# EAGLE board BatteryMonitor (EAGLE 7.1.0)
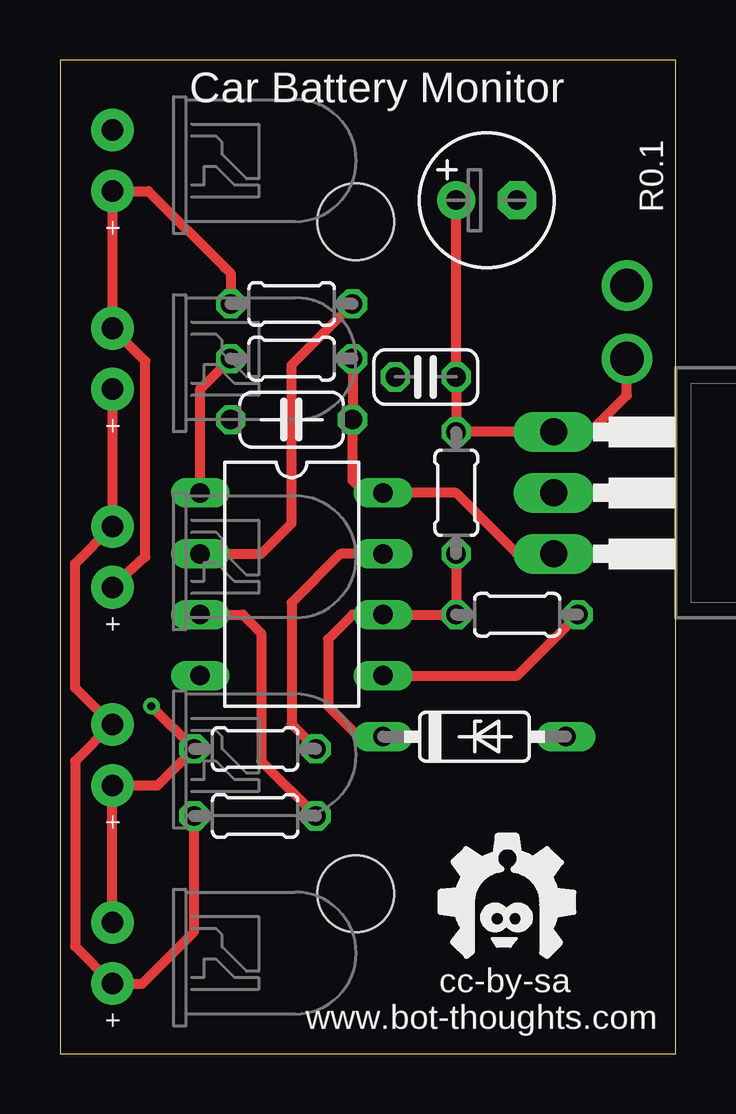
[diagram p0: board, top side]
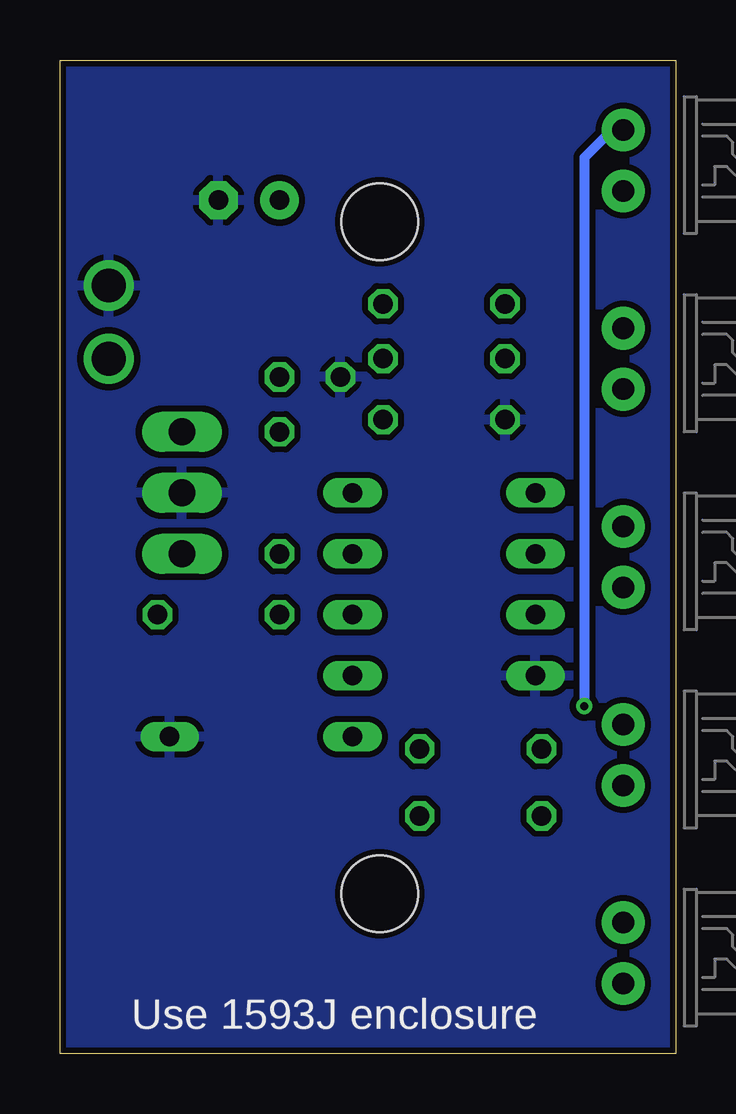
[diagram p1: board, bottom side, seen from below]

Size 25.65 x 41.4 mm. Coordinates in mm from the lower left corner, seen from the top.
Outline: 0,0 25.65,0 25.65,41.4 0,41.4 0,0
Copper layers (1*16): Top 0.0356mm / dielectric 1.5011mm / Bottom 0.0356mm
Design rules "LaenPCBOrder": minimum track width 6mil, minimum drill 13mil, track to track 10mil, track to pad 10mil, pad to pad 10mil, via to via 10mil, smd to smd 8mil, copper to edge 10mil, drill to drill 10mil, minimum pad ring 7mil, minimum via ring 7mil, stop-mask expansion 3mil, vias tented up to drill 20mil, thermal gap 10mil
Holes 3.2 mm at 12.32,6.67 12.32,34.66

## Footprints (pad centres in the part's own frame; a part is rotated, then mirrored left to right if it is on the bottom)
C050-024X044 = drill 0.813 octagon: 1 -2.54,0; 2 2.54,0
E2,5-6 = drill 0.813 pad 1.6: + -1.27,0 | drill 0.813 pad 1.6 octagon: - 1.27,0
C025-024X044 = drill 0.813 octagon: 1 -1.27,0; 2 1.27,0
DO35Z7 = drill 0.813 long: A 3.81,0; C -3.81,0
LED5MMRA = drill 0.9 pad 1.778: A 0,1.27; C 0,-1.27
0204/5 = drill 0.813 octagon: 1 -2.54,0; 2 2.54,0
DIL08 = drill 0.813 long: 1 -3.81,-3.81; 2 -1.27,-3.81; 3 1.27,-3.81; 4 3.81,-3.81; 5 3.81,3.81; 6 1.27,3.81; 7 -1.27,3.81; 8 -3.81,3.81
TO220BH-NH = drill 1.118 long: 1 -2.54,-6.35; 2 0,-6.35; 3 2.54,-6.35
PAD_18GA = drill 1.4: P$1 0,0

## Placement (x,y rotation side)
C1  104  [C050-024X044]  9.65,26.42 180 top
C2  106  [E2,5-6]  17.78,35.56 0 top
C3  104  [C025-024X044]  15.24,28.19 180 top
D2  5V  [DO35Z7]  17.27,13.21 0 top
LED1  yellow  [LED5MMRA]  2.18,12.45 180 top
LED2  red2  [LED5MMRA]  2.18,37.21 180 top
LED3  green  [LED5MMRA]  2.18,20.7 180 top
LED4  green  [LED5MMRA]  2.18,28.96 180 top
LED5  red1  [LED5MMRA]  2.18,4.19 180 top
R1  10K  [0204/5]  9.65,28.96 0 top
R2  5.1K  [0204/5]  19.05,18.29 180 top
R3  10K  [0204/5]  16.51,23.37 90 top
R4  330  [0204/5]  8.13,9.91 180 top
R5  330  [0204/5]  9.65,31.24 180 top
R6  330  [0204/5]  8.13,12.7 180 top
U1  TINY25  [DIL08]  9.65,19.56 270 top
U2  7805  [TO220BH-NH]  26.92,23.37 270 top
U$5  BTLOGO-LOGO-MD  [BTLOGOM]  18.54,3.81 0 top
X1  12V  [PAD_18GA]  23.62,28.96 180 top
X2  GND  [PAD_18GA]  23.62,32 180 top

## Library data of the parts
C1-C3 R1-R6 = bt_rcl
D2 = bt_diode
LED1-LED5 = bt_opto
U1 = bt_avr
U2 = bt_regulator
U$5 = bt
X1 X2 = bt_electromech

## Nets
12V: C2.+ C3.1 R3.2 U2.1 X1.P$1
GND: C1.2 C2.- C3.2 D2.A U1.4 U2.2 X2.P$1
N$1: R1.1 U1.1
N$2: LED2.A LED3.A LED4.C R5.2
N$3: LED1.C LED3.C LED4.A LED5.A R4.2
N$4: R4.1 U1.3
N$5: LED1.A LED2.C LED5.C R6.2
N$6: R5.1 U1.2
N$7: R6.1 U1.7
N$9: R2.1 U1.5
VCC: C1.1 R1.2 U1.8 U2.3
VTEST: D2.C R2.2 R3.1 U1.6

## Tracks (layer width: path | path; a pad name or v marks a point on that pad's centre or on a via)
12V
  Top 0.406: C2.+ C3.1 R3.2 U2.1 22.1,25.91 23.62,27.43 X1.P$1
GND
  pour Bottom: 0.03,41.4 25.65,41.4 25.9,0 0,0
N$1
  Top 0.406: U1.1 5.84,27.69 R1.1
N$2
  Top 0.406: LED4.C LED2.A 3.68,35.94 6.86,32.77 7.11,32.51 R5.2 | LED3.A 2.18,19.46 3.56,20.7 3.56,28.85 LED4.C | LED4.C 2.18,30.2
N$3
  Top 0.406: LED4.A LED3.C 0.64,20.42 0.64,15.24 2.16,13.72 | R4.2 5.59,5.08 3.43,2.92 LED5.A 0.64,4.47 0.64,12.19 2.16,13.72 | LED1.C 2.16,13.72
N$4
  Top 0.406: U1.3 7.62,18.29 8.38,17.53 8.38,12.19 R4.1
N$5  (via drill 0.33)
  Top 0.406: LED5.C LED1.A 4.06,11.18 R6.2 v3.81,14.48
  Bottom 0.406: LED2.C 2.67,38.48 3.81,37.34 v3.81,14.48
N$6
  Top 0.406: U1.2 8.38,20.83 9.65,22.1 9.65,28.7 R5.1
N$7
  Top 0.406: U1.7 11.68,20.83 9.65,18.8 9.65,13.72 R6.1
N$9
  Top 0.406: U1.5 19.05,15.75 R2.1
VCC
  Top 0.406: R1.2 C1.1 12.19,23.88 12.7,23.37 U1.8 16.51,23.37 19.05,20.83 U2.3
VTEST
  Top 0.406: R3.1 R2.2 U1.6 12.19,18.29 11.18,17.27 11.18,14.48 12.45,13.21 D2.C

## Text on the board
tNames: Car Battery Monitor | R0.1 | cc-by-sa | www.bot-thoughts.com
bNames: Use 1593J enclosure